# Altium PCB testrack_breakout.PcbDoc
Units mm, origin at the board's own origin, x right, y up, seen from the top; angles counter-clockwise.
Board outline 40 x 78 mm, 4 copper layers (Top Layer, Signal Layer 1, Signal Layer 2, Bottom Layer), stack 1.586 mm thick; 12 components, 29 nets, 170 pads, 66 vias.
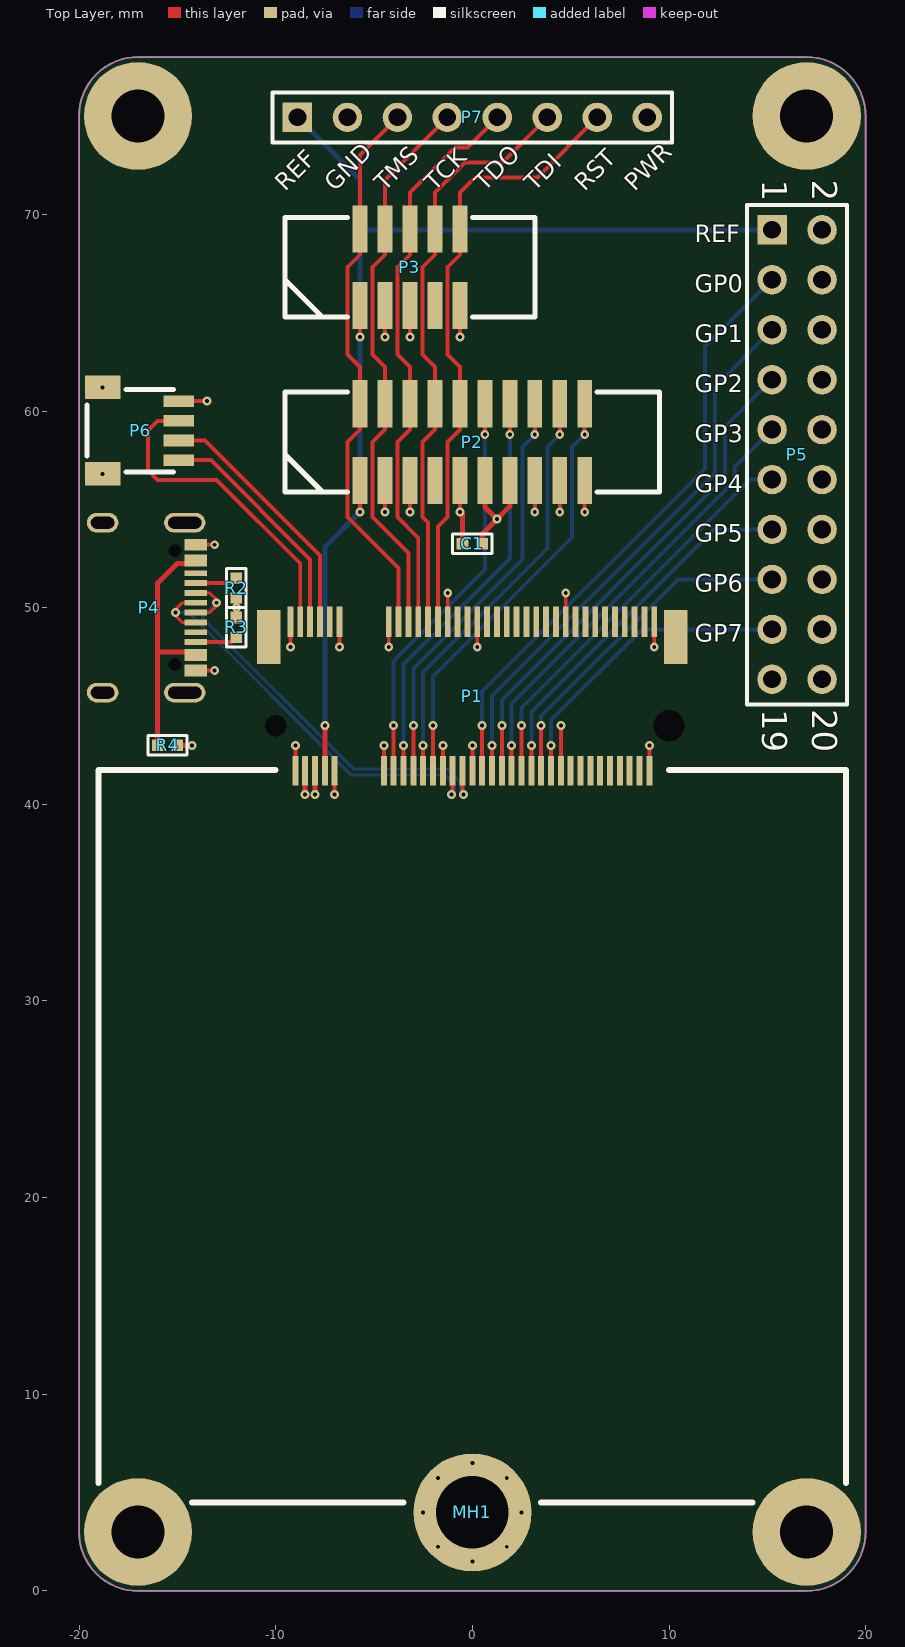
[diagram p0: Top Layer view]
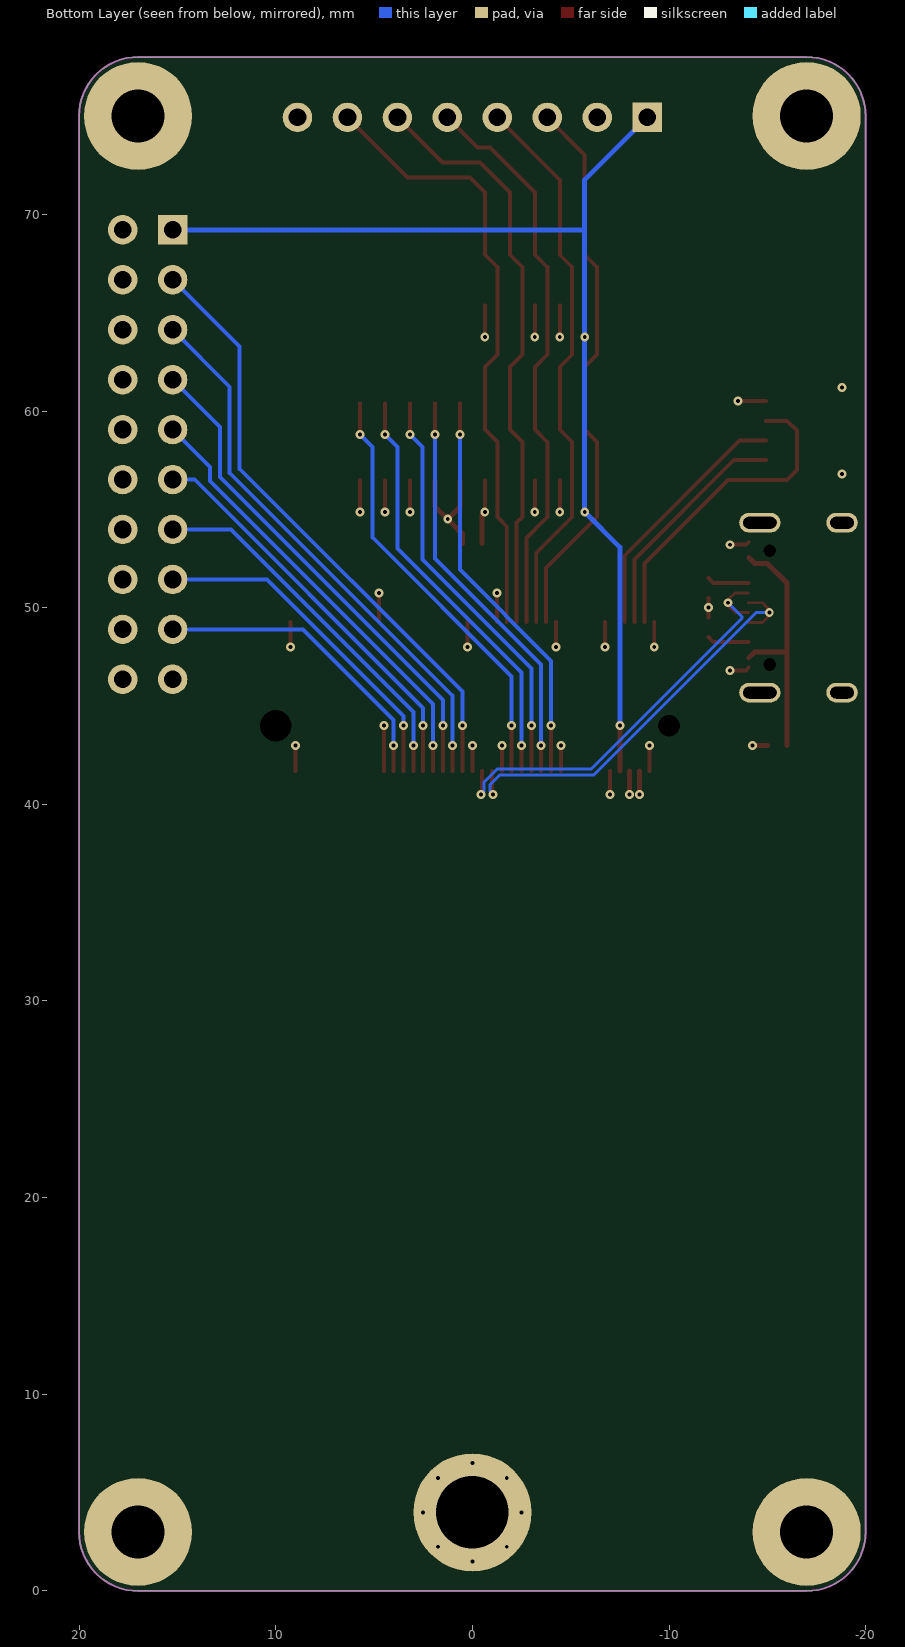
[diagram p1: Bottom Layer view, seen from below]
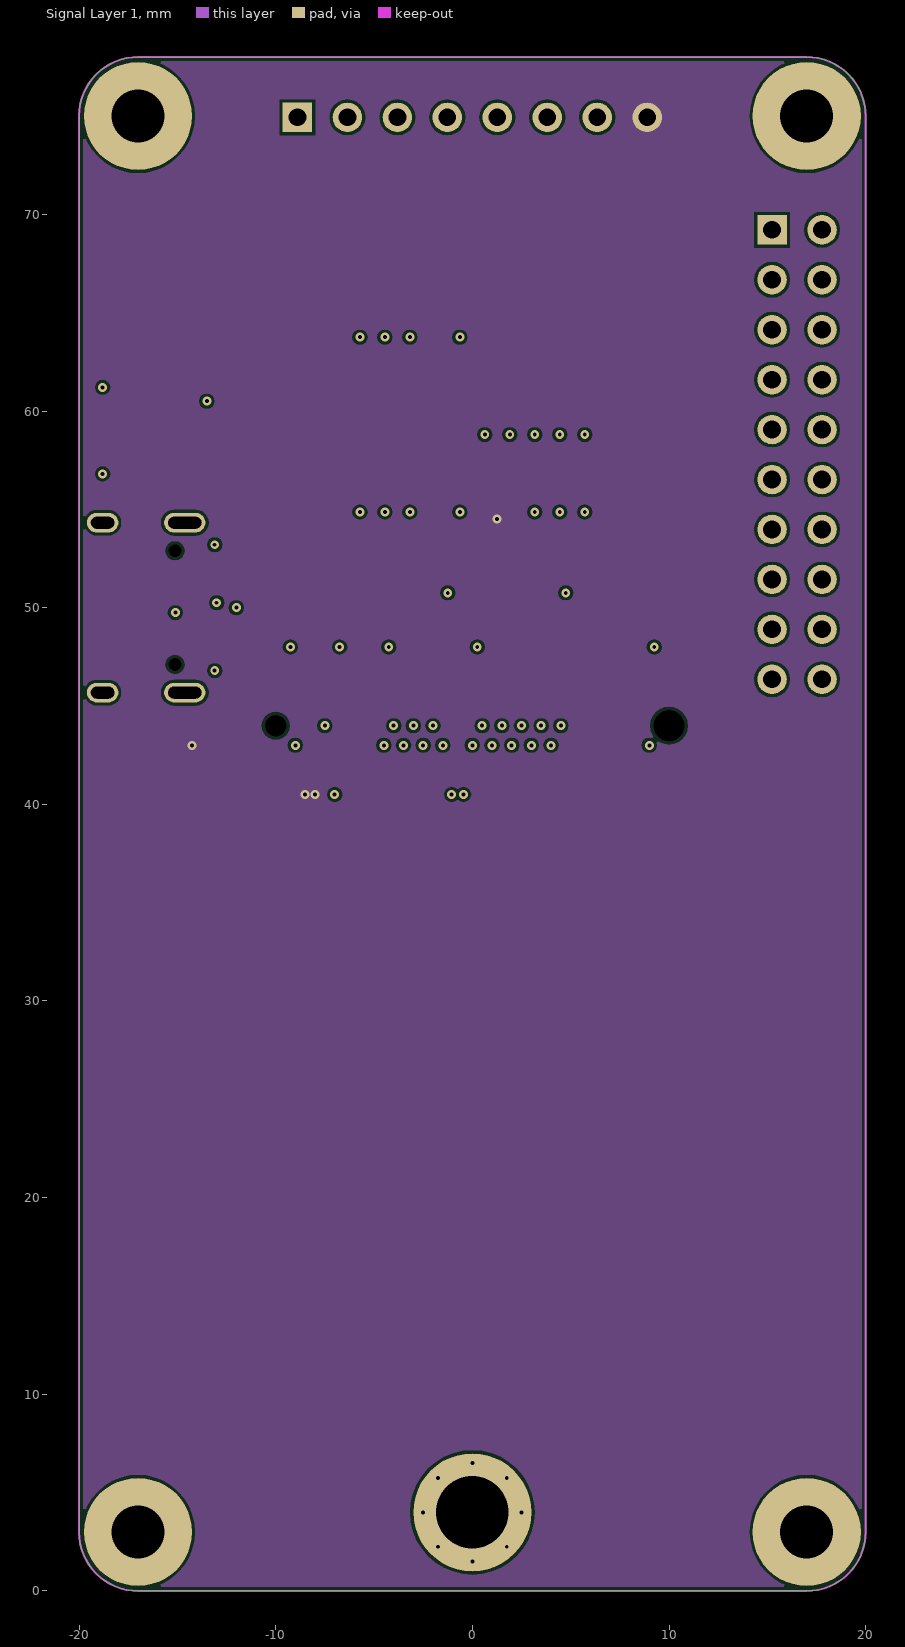
[diagram p2: Signal Layer 1]
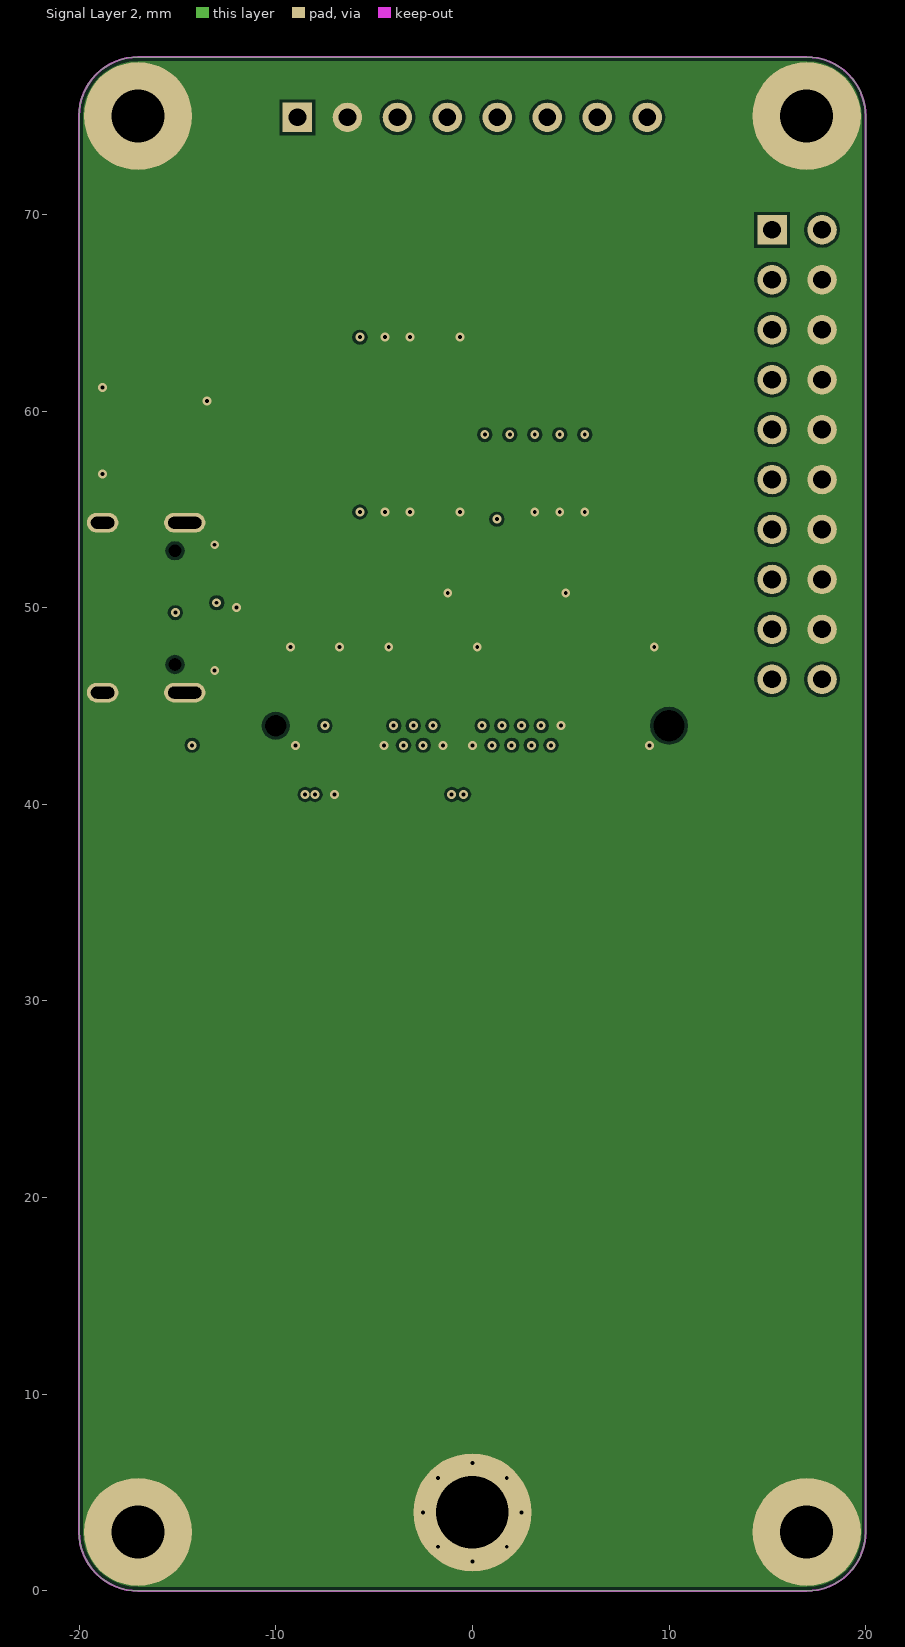
[diagram p3: Signal Layer 2]

## Layer stack, top to bottom
Top Solder: solder mask 0.0102, Solder Resist, Dk 3.5
Top Layer: signal copper 0.035
Dielectric 1: prepreg 0.2104, FR-4, Dk 4.2
Signal Layer 1: signal copper 0.0152
Dielectric 3: core 1.065, Dk 4.2
Signal Layer 2: signal copper 0.0152
Dielectric 2: prepreg 0.2104, Dk 4.2
Bottom Layer: signal copper 0.035
Bottom Solder: solder mask 0.0102, Solder Resist, Dk 3.5

## Board outline
-20,3 ccw(c-17,3) -17,0 17,0 ccw(c17,3) 20,3 20,75 ccw(c17,75) 17,78 -17,78 ccw(c-17,75) -20,75

## Design rules (kind name [scope] priority, off if disabled: settings)
Clearance [All] p1: gap=0.152
ComponentClearance [All] p1: gap=0 collisioncheckmode=3 verticalgap=0.254 showdistances=FALSE
DiffPairsRouting [All] p1: maxlimit=0.254 minlimit=0.152 mostfreqgap=0.152 toplayer_minwidth=0.152 toplayer_maxwidth=0.381 toplayer_prefwidth=0.152 midlayer1_minwidth=0.152 midlayer1_maxwidth=0.381 midlayer1_prefwidth=0.152 midlayer2_minwidth=0.152 midlayer2_maxwidth=0.381 midlayer2_prefwidth=0.152 bottomlayer_minwidth=0.152 bottomlayer_maxwidth=0.381 bottomlayer_prefwidth=0.152 maxuncoupledlength=12.7
HoleSize [All] p1: absolutevalues=TRUE maxlimit=5 minlimit=0.025 maxpercent=80.000 minpercent=20.000
MinimumSolderMaskSliver [All] p1: minsoldermaskwidth=0
PolygonConnect PolygonConnect_via [IsVia] p1: connectstyle=Direct reliefconductorwidth=0.254 reliefentries=4 polygonreliefangle="90 Angle" airgapwidth=0.254
PolygonConnect PolygonConnect_inner [All vs OnLayer('Signal Layer 1')] p2: connectstyle=Direct reliefconductorwidth=0.254 reliefentries=4 polygonreliefangle="90 Angle" airgapwidth=0.254
PolygonConnect [All] p3: connectstyle=Relief reliefconductorwidth=0.254 reliefentries=4 polygonreliefangle="90 Angle" airgapwidth=0.152
RoutingVias [All] p1: holewidth=0.2 width=0.45 viastyle="Through Hole" minholewidth=0.2 minwidth=0.45 maxholewidth=0.711 maxwidth=1.27
SilkToSilkClearance [All] p1: silktosilkclearance=0
SilkToSolderMaskClearance [IsPad] p1: minsilkscreentomaskgap=0 clearancetoexposedcopper=TRUE
SolderMaskExpansion SolderMaskExpansion_via [IsVia] p1: expansion=-0.508
SolderMaskExpansion [All] p2: expansion=0.102
Width [All] p1: maxlimit=1.27 minlimit=0.152 preferedwidth=0.152
24 further rules are at their usual default settings.

## Classes and differential pairs
component class connectors: C1 P2 P3 P4 P5 P6 P7 R2 R3 R4
component class target: MH1 P1
differential pair D: +D_P -D_N

## Components (designator, comment, footprint, x,y, rotation, side; value= is the part's Value field where it differs from the comment)
C1 "100nF" 0402 0,53.25 r0 top
MH1 "Mounting_Hole" WA-SMSI_M2.5 0,4 r90 top
P1 "M.2_B" M.2_B 0,44 r0 top locked
P2 "SWD-TRACE-FTSH110" FTSH110 0,58.42 r0 top
P3 "SWD-FTSH105" FTSH105 -3.175,67.31 r0 top
P4 "USBC" U262-161N-4BVC11 -18.8,50 r270 top
P5 "Header 10X2" HDR2X10 15.24,69.215 r270 top
P6 "SH4_I2C" SM04B -19.7,59 r270 top
P7 "Header 8" HDR1X8 -8.89,74.93 r0 top
R2 "5.1k" 0402 -12,51 r90 top
R3 "5.1k" 0402 -12,49 r270 top
R4 "NP" 0402 -15.5,43 r180 top

## Footprints (in the part's own frame and the unit in brackets; to place one, negate y for a bottom-side part, rotate by r counter-clockwise, add the part's x,y. Pads: shape width x height; smd on the part's side, far side on the other; paste and mask are expansions set on the pad)
0402 [mm]
  rect 0.6x0.6 smd: 1(-0.5,0) 2(0.5,0)
  silkscreen extent -1,-0.5 1,0.5, body extent -0.5,-0.25 0.5,0.25, height 0.4
FTSH105 [mm]
  rect 0.76x2.4 smd: 1(-2.54,-1.95) 2(-2.54,1.95) 3(-1.27,-1.95) 4(-1.27,1.95) 5(0,-1.95) 6(0,1.95) 7(1.27,-1.95) 8(1.27,1.95) 9(2.54,-1.95) 10(2.54,1.95)
  silkscreen extent -6.35,-2.54 6.35,2.54
FTSH110 [mm]
  rect 0.76x2.4 smd: 1(-5.715,-1.95) 2(-5.715,1.95) 3(-4.445,-1.95) 4(-4.445,1.95) 5(-3.175,-1.95) 6(-3.175,1.95) 7(-1.905,-1.95) 8(-1.905,1.95) 9(-0.635,-1.95) 10(-0.635,1.95) 11(0.635,-1.95) 12(0.635,1.95) 13(1.905,-1.95) 14(1.905,1.95) 15(3.175,-1.95) 16(3.175,1.95) 17(4.445,-1.95) 18(4.445,1.95) 19(5.715,-1.95) 20(5.715,1.95)
  silkscreen extent -9.53,-2.54 9.53,2.54
HDR1X8 [mm] "Connector; Header; 8 Position"
  rect 1.5x1.5 hole 0.9: 1(0,0)
  round 1.5 hole 0.9: 2(2.54,0) 3(5.08,0) 4(7.62,0) 5(10.16,0) 6(12.7,0) 7(15.24,0) 8(17.78,0)
  silkscreen extent -1.27,-1.27 19.05,1.27
HDR2X10 [mm] "Connector; Header; 10x2 Position"
  rect 1.5x1.5 hole 0.9: 1(0,0)
  round 1.5 hole 0.9: 2(0,2.54) 3(2.54,0) 4(2.54,2.54) 5(5.08,0) 6(5.08,2.54) 7(7.62,0) 8(7.62,2.54) 9(10.16,0) 10(10.16,2.54) 11(12.7,0) 12(12.7,2.54) 13(15.24,0) 14(15.24,2.54) 15(17.78,0) 16(17.78,2.54) 17(20.32,0) 18(20.32,2.54) 19(22.86,0) 20(22.86,2.54)
  silkscreen extent -1.27,-1.27 24.13,3.81
M.2_B [mm] "M.2 Socket, B-key"
  rect 0.3x1.55 smd: 1(-9.25,5.275) 3(-8.75,5.275) 5(-8.25,5.275) 7(-7.75,5.275) 9(-7.25,5.275) 11(-6.75,5.275) 21(-4.25,5.275) 23(-3.75,5.275) 25(-3.25,5.275) 27(-2.75,5.275) 29(-2.25,5.275) 31(-1.75,5.275) 33(-1.25,5.275) 35(-0.75,5.275) 37(-0.25,5.275) 39(0.25,5.275) 41(0.75,5.275) 43(1.25,5.275) 45(1.75,5.275) 47(2.25,5.275) 49(2.75,5.275) 51(3.25,5.275) 53(3.75,5.275) 55(4.25,5.275) 57(4.75,5.275) 59(5.25,5.275) 61(5.75,5.275) 63(6.25,5.275) 65(6.75,5.275) 67(7.25,5.275) 69(7.75,5.275) 71(8.25,5.275) 73(8.75,5.275) 75(9.25,5.275)
  rect 0.3x1.5 smd: 2(-9,-2.3) 4(-8.5,-2.3) 6(-8,-2.3) 8(-7.5,-2.3) 10(-7,-2.3) 20(-4.5,-2.3) 22(-4,-2.3) 24(-3.5,-2.3) 26(-3,-2.3) 28(-2.5,-2.3) 30(-2,-2.3) 32(-1.5,-2.3) 34(-1,-2.3) 36(-0.5,-2.3) 38(0,-2.3) 40(0.5,-2.3) 42(1,-2.3) 44(1.5,-2.3) 46(2,-2.3) 48(2.5,-2.3) 50(3,-2.3) 52(3.5,-2.3) 54(4,-2.3) 56(4.5,-2.3) 58(5,-2.3) 60(5.5,-2.3) 62(6,-2.3) 64(6.5,-2.3) 66(7,-2.3) 68(7.5,-2.3) 70(8,-2.3) 72(8.5,-2.3) 74(9,-2.3)
  rect 1.2x2.75 smd: ""(-10.35,4.5) ""(10.35,4.5)
  round 0 hole 1.1 unplated: ""(-10,0)
  round 0 hole 1.6 unplated: ""(10,0)
  body extent -10.95,-2.45 10.95,5.15, height 4.1
SM04B [mm]
  rect 0.6x1.55 smd: 1(-1.5,4.775) 2(-0.5,4.775) 3(0.5,4.775) 4(1.5,4.775)
  rect 1.2x1.8 smd: SH(-2.2,0.9) SH(2.2,0.9)
  silkscreen extent -2.1,0.1 2.1,4.5
U262-161N-4BVC11 [mm]
  rect 0.3x1.15 smd: A1(-3.35,4.745) A4(-2.55,4.745) A5(-1.25,4.745) A6(-0.25,4.745) A7(0.25,4.745) A8(1.25,4.745) A9(2.55,4.745) A12(3.35,4.745) B1(3.05,4.745) B4(2.25,4.745) B5(1.75,4.745) B6(0.75,4.745) B7(-0.75,4.745) B8(-1.75,4.745) B9(-2.25,4.745) B12(-3.05,4.745)
  oval 1x2.1 hole 0.6 slot 1.7 at 90 deg: SH(-4.32,4.18) SH(4.32,4.18)
  oval 1x1.6 hole 0.6 slot 1.2 at 90 deg: SH(-4.32,0) SH(4.32,0)
  rect 0x0 hole 0.65 unplated: ""(-2.89,3.68) ""(2.89,3.68)
  body extent -4.48,-2.6 4.46,5.01, height 3.35
WA-SMSI_M2.5 [mm] "Solder in standoff, M2.5"
  round 6 hole 3.7 unplated: 1(0,0)

## Part data
C1: library part Capacitor
P5: "Header, 10-Pin, Dual row"
P6: "Qwiic / STEMMA QT Compatible"
P7: "Header, 8-Pin"
R2 R3 R4: library part Resistor

## Free pads (board coordinates)
  round 5.5 hole 2.7: ""(-17,3) ""(-17,75) ""(17,3) ""(17,75)

## Via types
v1: diameter 0.45, hole 0.2, Top Layer to Bottom Layer, 66 vias

## Nets (pads, with @x,y where several pads share a name; then routed paths per layer and width w, separated by ;. In a path a pad name is that pad's centre, name@x,y a point inside that pad or via, vN(x,y) a via of type N, cw(c..) or ccw(c..) an arc to the next point about the centre after c; other vN are vias at no path point)
D_N: P1.36 P4.A7 P4.B7 | length 22.2
  Top Layer w0.152: P4.A7 -13.35,49.75 -13,50.1 v1(-13,50.25) -13,50.4 -13.35,50.75 P4.B7
  Top Layer w0.203: P1.36 -0.5,40.551 v1(-0.449,40.5)
  Bottom Layer w0.152: v1(-13,50.25) -13.7,49.55 -13.7,49.45 -6.055,41.805 -1.276,41.805 -0.598,41.126 -0.598,40.649 v1(-0.449,40.5)
D_P: P1.34 P4.A6 P4.B6 | length 22.3
  Top Layer w0.152: P4.B6 -14.75,49.25 -15.1,49.6 v1(-15.1,49.75) -15.1,49.9 -14.75,50.25 P4.A6
  Top Layer w0.203: v1(-1.051,40.5) -1,40.551 P1.34
  Bottom Layer w0.152: v1(-15.1,49.75) -14.431,49.75 -6.181,41.5 -1.402,41.5 -0.902,41 -0.902,40.649 v1(-1.051,40.5)
GND: C1.1 MH1.1 P1.1 P1.2 P1.10 P1.11 P1.20 P1.21 P1.32 P1.33 P1.38 P1.39 P1.56 P1.57 P1.74 P1.75 P2.3 P2.5 P2.9 P2.15 P2.17 P2.19 P3.3 P3.5 P3.9 P4.A1 P4.A12 P4.B1 P4.B12 P4.SH P5.4 P5.6 P5.8 P5.10 P5.12 P5.14 P5.16 P5.18 P6.1 P6.SH P7.2 pad. R2.1 R3.1 | length 39.9
  Top Layer w0.203: P6.1 v1(-13.5,60.5) ; P4.B1 -13.905,46.8 v1(-13.1,46.8) ; P4.A1 -13.905,53.2 v1(-13.1,53.2) ; R3.1 v1(-12,50) R2.1 ; v1(-9.25,48) P1.1 ; P1.2 v1(-9,43) ; v1(-7,40.5) P1.10 ; v1(-6.75,48) P1.11 ; P1.20 v1(-4.5,43) ; v1(-4.445,54.864) P2.3 ; v1(-4.445,63.754) P3.3 ; v1(-4.25,48) P1.21 ; v1(-3.175,54.864) P2.5 ; v1(-3.175,63.754) P3.5 ; P1.32 v1(-1.5,43) ; P1.33 v1(-1.25,50.75) ; v1(-0.635,54.864) P2.9 ; v1(-0.635,63.754) P3.9 ; P1.38 v1(0,43) ; v1(0.25,48) P1.39 ; v1(3.175,54.864) P2.15 ; v1(4.445,54.864) P2.17 ; P1.56 v1(4.5,44) ; P1.57 v1(4.75,50.75) ; v1(5.715,54.864) P2.19 ; P1.74 v1(9,43) ; v1(9.25,48) P1.75
  Top Layer w0.254: v1(-0.635,54.864) -0.5,54.729 C1.1
  other v1: 0,1.5 -1.75,2.25 1.75,2.25 -2.5,4 2.5,4 -1.75,5.75 1.75,5.75 0,6.5 -18.8,56.8 -18.8,61.2
GPIO0: P1.40 P5.3 | length 31.1
  Top Layer w0.203: P1.40 v1(0.5,44)
  Bottom Layer w0.203: v1(0.5,44) 0.5,45.728 11.835,57.063 11.835,63.27 P5.3
GPIO1: P1.42 P5.5 | length 28.3
  Top Layer w0.203: P1.42 v1(1,43)
  Bottom Layer w0.203: v1(1,43) 1,45.521 12.335,56.856 12.335,61.23 P5.5
GPIO2: P1.44 P5.7 | length 25.6
  Top Layer w0.203: P1.44 v1(1.5,44)
  Bottom Layer w0.203: v1(1.5,44) 1.5,45.314 12.835,56.649 12.835,59.19 P5.7
GPIO3: P1.46 P5.9 | length 22.8
  Top Layer w0.203: P1.46 v1(2,43)
  Bottom Layer w0.203: v1(2,43) 2,45.107 13.335,56.442 13.335,57.15 P5.9
GPIO4: P1.48 P5.11 | length 20.8
  Top Layer w0.203: P1.48 v1(2.5,44)
  Bottom Layer w0.203: v1(2.5,44) 2.5,44.9 14.115,56.515 P5.11
GPIO5: P1.50 P5.13 | length 19.1
  Top Layer w0.203: P1.50 v1(3,43)
  Bottom Layer w0.203: v1(3,43) 3,44.693 12.282,53.975 P5.13
GPIO6: P1.52 P5.15 | length 17.4
  Top Layer w0.203: P1.52 v1(3.5,44)
  Bottom Layer w0.203: v1(3.5,44) 3.5,44.486 10.449,51.435 P5.15
GPIO7: P1.54 P5.17 | length 15.7
  Top Layer w0.203: P1.54 v1(4,43)
  Bottom Layer w0.203: v1(4,43) 4,44.279 8.616,48.895 P5.17
JTCK: P1.25 P2.4 P3.4 P7.4 | length 28.5
  Top Layer w0.203: P1.25 -3.25,52.78 -5.08,54.61 -5.08,58.42 -4.445,59.055 P2.4 -4.445,62.23 -5.08,62.865 -5.08,67.31 -4.445,67.945 P3.4 -4.445,71.755 P7.4
JTDI: P1.29 P2.8 P3.8 P7.6 | length 30
  Top Layer w0.203: P1.29 -2.25,54.32 -2.54,54.61 -2.54,58.42 -1.905,59.055 P2.8 -1.905,62.23 -2.54,62.865 -2.54,67.31 -1.905,67.945 P3.8 -1.905,71.12 -0.381,72.644 1.524,72.644 P7.6
JTDO: P1.27 P2.6 P3.6 P7.5 | length 29.1
  Top Layer w0.203: P1.27 -2.75,53.55 -3.81,54.61 -3.81,58.42 -3.175,59.055 P2.6 -3.175,62.23 -3.81,62.865 -3.81,67.31 -3.175,67.945 P3.6 -3.175,71.12 -0.889,73.406 -0.254,73.406 P7.5
JTMS: P1.23 P2.2 P3.2 P7.3 | length 28.3
  Top Layer w0.203: P7.3 -5.715,73.025 P3.2 -5.715,67.945 -6.35,67.31 -6.349,67.309 -6.349,62.864 -5.715,62.23 P2.2 -5.715,59.055 -6.35,58.42 -6.35,54.61 -3.75,52.01 P1.23
NetP4_A4: P4.A4 P4.A9 P4.B4 P4.B9 R4.2 | length 12.8
  Top Layer w0.254: R4.2 -16,47.75 ; P4.A9 -14.355,47.75 -16,47.75 ; P4.A4 -14.355,52.25 -15,52.25 -16,51.25 -16,47.75
NetP4_A5: P4.A5 R2.2 | length 2.2
  Top Layer w0.203: P4.A5 -12.25,51.25 R2.2
NetP4_B5: P4.B5 R3.2 | length 2.2
  Top Layer w0.203: P4.B5 -12.25,48.25 R3.2
NRST: P1.31 P2.10 P3.10 P7.7 | length 31.4
  Top Layer w0.203: P1.31 -1.75,54.13 -1.27,54.61 -1.27,58.42 -0.635,59.055 P2.10 -0.635,62.23 -1.27,62.865 -1.27,67.31 -0.635,67.945 P3.10 -0.635,71.12 0.127,71.882 3.302,71.882 P7.7
SCL: P1.5 P6.4 | length 11.9
  Top Layer w0.203: P6.4 -13.293,57.5 -8.25,52.457 P1.5
SDA: P1.7 P6.3 | length 13
  Top Layer w0.203: P6.3 -13.586,58.5 -7.75,52.664 P1.7
TRACECLK: P1.22 P2.12 | length 20.6
  Top Layer w0.203: P1.22 v1(-4,44) ; v1(0.635,58.801) P2.12
  Bottom Layer w0.203: v1(-4,44) -4,47.3 0.635,51.935 v1(0.635,58.801)
TRACED0: P1.24 P2.14 | length 20.9
  Top Layer w0.203: P1.24 v1(-3.5,43) ; v1(1.905,58.801) P2.14
  Bottom Layer w0.203: v1(-3.5,43) -3.5,47.1 1.905,52.505 v1(1.905,58.801)
TRACED1: P1.26 P2.16 | length 21.2
  Top Layer w0.203: P1.26 v1(-3,44) ; v1(3.175,58.801) P2.16
  Bottom Layer w0.203: v1(-3,44) -3,46.9 2.54,52.44 2.54,58.166 v1(3.175,58.801)
TRACED2: P1.28 P2.18 | length 21.5
  Top Layer w0.203: P1.28 v1(-2.5,43) ; v1(4.445,58.801) P2.18
  Bottom Layer w0.203: v1(-2.5,43) -2.5,46.7 3.81,53.01 3.81,58.166 v1(4.445,58.801)
TRACED3: P1.30 P2.20 | length 21.9
  Top Layer w0.203: P1.30 v1(-2,44) ; v1(5.715,58.801) P2.20
  Bottom Layer w0.203: v1(-2,44) -2,46.5 5.08,53.58 5.08,58.166 v1(5.715,58.801)
V3.3: P1.3 P6.2 | length 16.5
  Top Layer w0.203: P6.2 -16,59.5 -16.5,59 -16.5,57 -16,56.5 -13,56.5 -8.75,52.25 P1.3
VTPWR: C1.2 P1.4 P1.6 P2.11 P2.13 P7.8 R4.1 | length 9.2
  Top Layer w0.254: R4.1 v1(-14.25,43) ; v1(-8.5,40.5) P1.4 ; v1(-8,40.5) P1.6 ; C1.2 0.5,53.75 v1(1.25,54.5) ; P2.11 0.635,55.115 v1(1.25,54.5) ; P2.13 1.905,55.155 v1(1.25,54.5)
VTREF: P1.8 P2.1 P3.1 P5.1 P7.1 | length 59.5
  Top Layer w0.203: v1(-5.715,54.864) P2.1 ; v1(-5.715,63.754) P3.1
  Top Layer w0.254: P1.8 v1(-7.5,44)
  Bottom Layer w0.254: P7.1 -5.715,71.755 v1(-5.715,63.754) v1(-5.715,54.864) -7.5,53.079 v1(-7.5,44) ; -5.715,69.215 P5.1
pads on no net: P1. P1.9 P1.35 P1.37 P1.41 P1.43 P1.45 P1.47 P1.49 P1.51 P1.53 P1.55 P1.58 P1.59 P1.60 P1.61 P1.62 P1.63 P1.64 P1.65 P1.66 P1.67 P1.68 P1.69 P1.70 P1.71 P1.72 P1.73 P2.7 P3.7 P4. P4.A8 P4.B8 P5.2 P5.19 P5.20

## Polygon pours and split planes (outlines as drawn)
GND on Signal Layer 2 "GND_L03_P000" (solid, remove dead copper, pour order 0): -20,0 20,0 20,78 -20,78
VTPWR on Signal Layer 1 "VTPWR_L02_P002" (solid, remove dead copper, pour order 2): -20,0 20,0 20,78 -20,78

## Keep-outs
Keep-Out Layer:
  the board outline again, w0.1

## Silkscreen, mask and mechanical layers (free items; w line width, h text height)
Top Overlay:
  lines w0.3: -19,5.5 -19,41.75 -10,41.75 ; -14.25,4.5 -3.5,4.5 ; 3.5,4.5 14.25,4.5 ; 10,41.75 19,41.75 19,5.5
  text "REF" at -9.525,71.12 h0.89 r45
  text "GND" at -6.985,71.12 h0.89 r45
  text "TMS" at -4.445,71.12 h0.89 r45
  text "TCK" at -1.905,71.12 h0.89 r45
  text "TDO" at 0.635,71.12 h0.89 r45
  text "TDI" at 3.175,71.12 h0.89 r45
  text "RST" at 5.715,71.12 h0.89 r45
  text "PWR" at 8.255,71.12 h0.89 r45
  text "REF" at 11.303,68.58 h0.89
  text "GP0" at 11.303,66.04 h0.89
  text "GP1" at 11.303,63.5 h0.89
  text "GP2" at 11.303,60.96 h0.89
  text "GP3" at 11.303,58.42 h0.89
  text "GP4" at 11.303,55.88 h0.89
  text "GP5" at 11.303,53.34 h0.89
  text "GP6" at 11.303,50.8 h0.89
  text "GP7" at 11.303,48.26 h0.89

## Text inside footprints (layer, text, board x,y; h text height)
P5: Top Overlay "20" at 17.272,44.831 h1.27 r270; Top Overlay "19" at 14.732,44.831 h1.27 r270; Top Overlay "1" at 14.732,71.755 h1.27 r270; Top Overlay "2" at 17.272,71.755 h1.27 r270